# EAGLE board stepper-v1.1 (EAGLE 6.4)
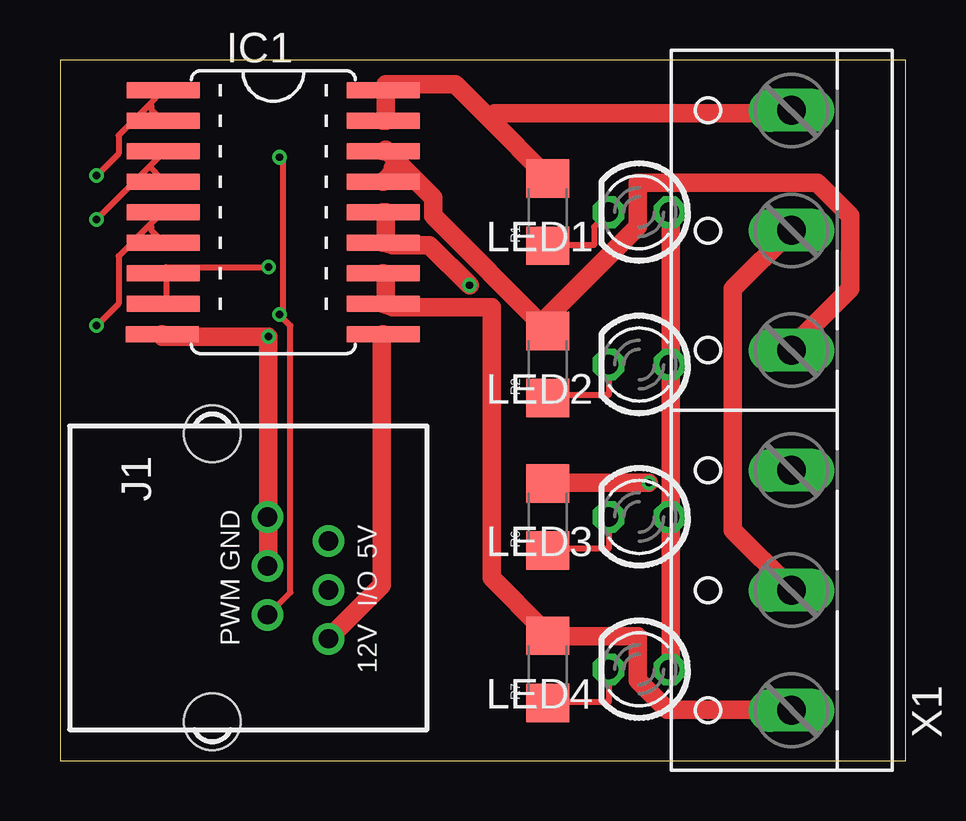
[diagram p0: board, top side]
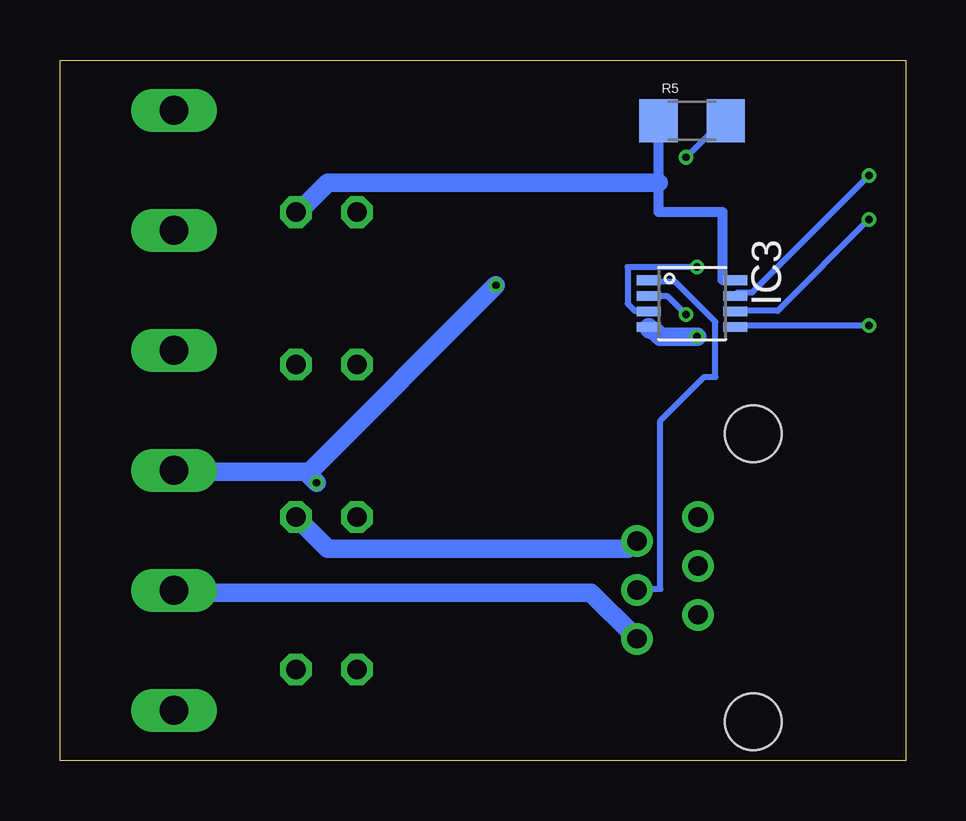
[diagram p1: board, bottom side, seen from below]

Size 35.23 x 29.2 mm. Coordinates in mm from the lower left corner, seen from the top.
Outline: 0,0 35.23,0 35.23,29.2 0,29.2 0,0
Copper layers (1*16): Top 0.035mm / dielectric 1.5mm / Bottom 0.035mm
Design rules "Fusion_eagle_rule_v1.1": minimum track width 6mil, minimum drill 12mil, track to track 6mil, track to pad 6mil, pad to pad 6mil, via to via 6mil, smd to smd 0mil, copper to edge 10mil, drill to drill 10mil, minimum pad ring 10mil, minimum via ring 6mil, stop-mask expansion 2mil, vias tented up to drill 100mil, thermal gap 10mil
Net classes: 0 default: width 0.254 mm; 1 power: width 0.762 mm
vRestrict: area 1.9,15.2 to 8.3,29.2; area 9.5,15.2 to 15.9,29.2

## Footprints (pad centres in the part's own frame; a part is rotated, then mirrored left to right if it is on the bottom)
SO18W = smd 0.66 x 3.048: 1 -5.08,-4.585; 2 -3.81,-4.585; 3 -2.54,-4.585; 4 -1.27,-4.585; 5 0,-4.585; 6 1.27,-4.585; 7 2.54,-4.585; 8 3.81,-4.585; 9 5.08,-4.623; 10 5.08,4.585; 11 3.81,4.585; 12 2.54,4.585; 13 1.27,4.585; 14 0,4.585; 15 -1.27,4.585; 16 -2.54,4.585; 17 -3.81,4.585; 18 -5.08,4.585
SSOP08 = smd 0.4 x 1: 1 -0.975,-1.8; 2 -0.325,-1.8; 3 0.325,-1.8; 4 0.975,-1.8; 5 0.975,1.8; 6 0.325,1.8; 7 -0.325,1.8; 8 -0.975,1.8
RJ12-RIGHTANGLE = drill 0.8 pad 1.3: +5V -1.54,4.84; +12V 2.54,4.84; GND1 -2.54,2.3; GND2 -0.5,2.3; I/O 0.5,4.84; PWM 1.54,2.3 | hole 2.36: -6,0; 6,0
LED3MM = drill 0.813 octagon: A -1.27,0; K 1.27,0
1206 = smd 1.6 x 1.8: 1 -1.4,0; 2 1.4,0
W237-6 = drill 1.194 long: 1 -12.5,-1.27; 2 -7.5,-1.27; 3 -2.5,-1.27; 4 2.5,-1.27; 5 7.5,-1.27; 6 12.5,-1.27

## Placement (x,y rotation side)
IC1  [SO18W]  8.89,22.86 270 top
IC3  74139  [SSOP08]  8.89,19.05 270 bottom
J1  RJ12RIGHTANGLE  [RJ12-RIGHTANGLE]  6.35,7.62 270 top
LED1  LED3MM  [LED3MM]  24.13,22.86 180 top
LED2  LED3MM  [LED3MM]  24.13,16.51 180 top
LED3  LED3MM  [LED3MM]  24.13,10.16 180 top
LED4  LED3MM  [LED3MM]  24.13,3.81 180 top
R1  1k  [1206]  20.32,22.86 90 top
R2  1k  [1206]  20.32,16.51 90 top
R5  1k  [1206]  8.89,26.67 0 bottom
R6  1k  [1206]  20.32,10.16 90 top
R7  1k  [1206]  20.32,3.81 90 top
X1  [W237-6]  29.21,14.61 90 top

## Library data of the parts
IC1 IC3 J1 LED1-LED4 = lpatiny
R1 R2 R5-R7 = SparkFun
X1 = con-wago-500; OC_FARNELL: unknown; OC_NEWARK: unknown

## Nets
+5V [power]: IC3.8 J1.+5V LED1.A LED2.A LED3.A LED4.A R5.1
+12V [power]: IC1.10 J1.+12V X1.2 X1.5
GND [power]: IC1.9 IC3.4 J1.GND1 J1.GND2
N$1: IC1.1 IC1.2 IC3.7
N$2: IC3.2 J1.PWM R5.2
N$3 [power]: IC1.17 IC1.18 R1.2 X1.6
N$4 [power]: IC1.15 IC1.16 R2.2 X1.4
N$5 [power]: IC1.13 IC1.14 R6.2 X1.3
N$6 [power]: IC1.11 IC1.12 R7.2 X1.1
N$7: IC1.7 IC1.8 IC3.3
N$8: IC1.3 IC1.4 IC3.6
N$9: LED1.K R1.1
N$10: LED2.K R2.1
N$11: LED3.K R6.1
N$12: LED4.K R7.1
N$13: IC3.1 J1.I/O
N$14: IC1.5 IC1.6 IC3.5

## Tracks (layer width: path | path; a pad name or v marks a point on that pad's centre or on a via)
+5V
  Top 0.762: LED4.A 25.45,3.81 25.45,10.06 LED3.A 25.45,10.52 25.45,16.46 LED2.A 25.45,16.76 25.45,22.86 LED1.A
  Bottom 0.406: IC3.8 7.62,20.02 7.62,22.86 10.29,22.86 10.29,24.08 R5.1
  Bottom 0.762: LED3.A 24.08,8.84 11.58,8.84 11.28,9.14 J1.+5V | 10.29,24.08 24.08,24.08 25.3,22.86 LED1.A
+12V
  Top 0.762: J1.+12V 11.28,5.18 13.41,7.32 13.41,17.68 IC1.10 | X1.2 30.48,7.16 28.04,9.6 28.04,19.66 30.48,22.1 X1.5
  Bottom 0.762: J1.+12V 11.28,5.18 13.11,7.01 30.48,7.01 X1.2
GND  (via drill 0.3)
  Top 0.762: J1.GND2 8.69,8.23 8.69,10.06 J1.GND1 8.69,10.52 v8.69,17.68 4.27,17.68 IC1.9
  Bottom 0.762: IC3.4 10.67,17.98 10.36,17.83 10.21,17.68 v8.69,17.68
N$1  (via drill 0.3)
  Top 0.254: v1.52,24.38 2.44,25.3 2.44,26.06 3.73,27.36 | 3.73,27.36 4.27,27.89 IC1.1 | IC1.2 4.27,26.67 3.81,27.13 3.81,27.28 3.73,27.36
  Bottom 0.254: v1.52,24.38 6.4,19.51 7.01,19.51 IC3.7
N$2  (via drill 0.3)
  Top 0.254: J1.PWM 8.69,6.1 9.6,7.01 9.6,18.14 v9.14,18.59 9.3,18.59 9.3,24.99 v9.14,25.15
  Bottom 0.254: v9.14,18.59 9.91,19.36 10.67,19.36 IC3.2 | v9.14,25.15 7.62,26.67 R5.2
N$3
  Top 0.762: 17.91,26.75 16.46,28.19 13.56,28.19 13.56,28.04 IC1.18 13.56,27.58 13.56,26.67 IC1.17 | 17.91,26.75 20.27,24.38 R1.2 | X1.6 30.48,26.98 18.14,26.98 17.91,26.75
N$4
  Top 0.762: 14.1,24.92 13.56,25.45 IC1.16 | 14.1,24.92 15.54,23.47 15.54,22.71 20.27,17.98 R2.2 20.27,18.44 24.08,22.25 24.08,24.08 31.55,24.08 32.92,22.71 32.92,19.66 30.48,17.22 X1.4 | IC1.15 13.56,24.23 13.87,24.54 13.87,24.69 14.1,24.92
N$5  (via drill 0.3)
  Top 0.762: IC1.14 13.56,22.86 13.56,21.64 IC1.13 13.87,21.49 15.39,21.49 v17.07,19.81 | v24.54,11.58 20.42,11.58 R6.2
  Bottom 0.762: 24.92,11.96 24.99,12.04 30.48,12.04 X1.3 | 24.92,11.96 v24.54,11.58 | 24.92,11.96 v17.07,19.81
N$6
  Top 0.762: IC1.12 13.56,20.27 13.56,19.05 IC1.11 13.87,18.9 17.98,18.9 17.98,7.62 20.12,5.49 R7.2 20.42,5.18 24.08,5.18 24.08,3.35 25.3,2.13 30.48,2.13 X1.1
N$7  (via drill 0.3)
  Top 0.254: v8.69,20.57 4.42,20.57 4.42,20.42 IC1.7 4.42,20.27 4.42,19.05 IC1.8
  Bottom 0.254: v8.69,20.57 11.58,20.57 11.58,19.05 11.28,18.75 10.82,18.75 IC3.3
N$8  (via drill 0.3)
  Top 0.254: 3.73,24.77 4.27,25.3 IC1.3 | 3.73,24.77 v1.52,22.55 | 3.73,24.77 4.27,24.23 IC1.4
  Bottom 0.254: v1.52,22.55 5.33,18.75 7.01,18.75 IC3.6
N$9
  Top 0.254: LED1.K 22.25,22.25 22.25,21.49 20.42,21.49 R1.1
N$10
  Top 0.254: LED2.K 22.86,15.24 20.42,15.24 R2.1
N$11
  Top 0.254: LED3.K 22.86,8.84 20.42,8.84 R6.1
N$12
  Top 0.254: LED4.K 22.86,2.44 20.42,2.44 R7.1
N$13
  Bottom 0.254: IC3.1 10.67,19.96 9.6,19.96 7.92,18.29 7.92,16 8.38,16 10.21,14.17 10.21,7.16 11.12,7.16 J1.I/O
N$14  (via drill 0.3)
  Top 0.254: v1.52,18.14 2.44,19.05 2.44,21.03 3.73,22.33 | 3.73,22.33 4.27,22.86 IC1.5 | IC1.6 4.27,21.64 3.81,22.1 3.81,22.25 3.73,22.33
  Bottom 0.254: v1.52,18.14 7.01,18.14 IC3.5

## Text on the board
tDocu: Stepper 1.1 - 12V